# Altium PCB ESP32 with USBC PCB V1I1.PcbDoc (part 2 of 2)
Units mil, origin at the board's own origin, x right, y up, seen from the top; angles counter-clockwise.
Board outline 2700 x 1000 mil, 4 copper layers (L1, L2, L3, L4), stack 61.583 mil thick; 64 components, 73 nets, 299 pads, 161 vias.
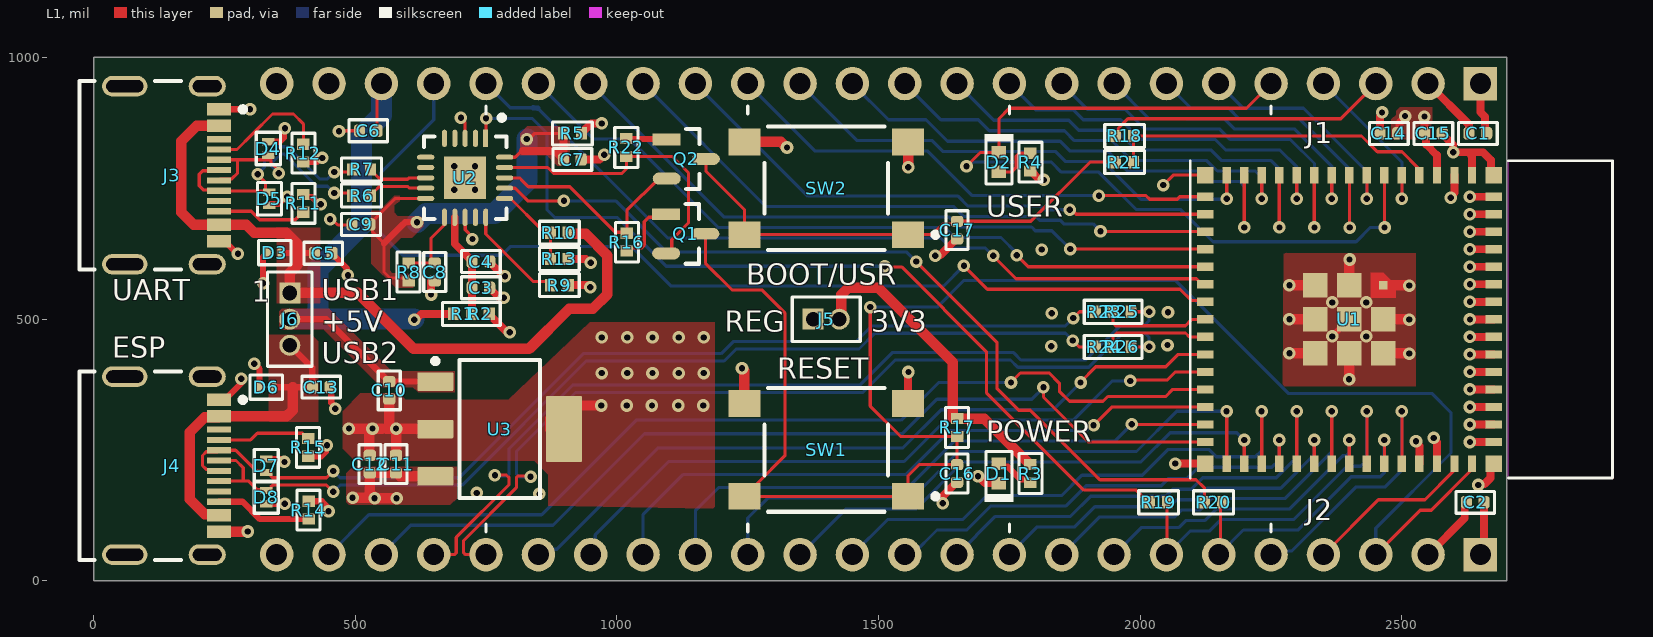
[diagram p0: L1 view]

## Part data (continued)
U2: "IC USB SERIAL FULL UART 20QFN", Case/Package=HVQCCN, LCSC Part Number=C132159, Manufacturer=FTDI, Max Operating Temperature=85°C, Max Supply Current=8.4mA, Max Supply Voltage=5.5V, Min Operating Temperature=-40°C, Min Supply Voltage=2.97V, Nominal Supply Voltage=5V, Package Shape=Square, Package Style="CHIP CARRIER, HEAT SINK/SLUG, VERY THIN PROFILEMeter", Power Supplies=3.3/5V, Supplier Part Number=768-1128-1-ND, Temperature Grade=INDUSTRIAL, Category="Interface ICs", ComponentLink1Description=https://datasheet.ciiva.com:443/pdfs/VipMasterIC/IC/FTDI/FTDIS00099/FTDIS00099-1.pdf?src-supplier=IHS+Markit, ComponentLink1URL=https://datasheet.ciiva.com:443/pdfs/VipMasterIC/IC/FTDI/FTDIS00099/FTDIS00099-1.pdf?src-supplier=IHS+Markit, ComponentLink2Description=https://datasheet.ciiva.com/1787/ds-ft231x-1787312.pdf?src-supplier=Digikey, ComponentLink2URL=https://datasheet.ciiva.com/1787/ds-ft231x-1787312.pdf?src-supplier=Digikey, ComponentLink3Description=https://datasheet.ciiva.com/30475/0900766b811020d3-30475405.pdf?src-supplier=Rs, ComponentLink3URL=https://datasheet.ciiva.com/30475/0900766b811020d3-30475405.pdf?src-supplier=Rs, ComponentLink4Description=https://datasheet.ciiva.com/4787/ds-ft231x-13571-4787570.pdf?src-supplier=Mouser, ComponentLink4URL=https://datasheet.ciiva.com/4787/ds-ft231x-13571-4787570.pdf?src-supplier=Mouser, ComponentLink5Description=https://datasheet.ciiva.com/1787/ft-x-series-1787313.pdf?src-supplier=Digikey, ComponentLink5URL=https://datasheet.ciiva.com/1787/ft-x-series-1787313.pdf?src-supplier=Digikey, ComponentLink6Description=https://datasheet.ciiva.com/1787/ft-x-series-1787314.pdf?src-supplier=Digikey, ComponentLink6URL=https://datasheet.ciiva.com/1787/ft-x-series-1787314.pdf?src-supplier=Digikey, Height - Seated (Max)=0.8mm, JESD-30 Code=S-XQCC-N20, Length=4mm, Manufacturer Part Number=FT231XQ-R, Pins=20, Pricing="1=2.34, 25=2.27, 100=2.2, 250=2, 500=1.82002, 1000=1.7625 (USD)", Qualification Status="Not Qualified", Reach SVHC Compliant=Yes, RoHS=Yes, RoHS Compliant=Yes, Stock=35802, Supplier=Digikey, Surface Mount=Yes, Technology=CMOS, Terminal Form="No Lead", Terminal Pitch=0.5mm, Terminal Position=QUAD, Width=4mm
U3: "IC REG LIN 3.3V 1.5A SOT-223-4", Case/Package=SOP, Dropout Voltage1-Max=550mV, Dropout Voltage1-Nom=340mV, Input Voltage Absolute-Max=20V, LCSC Part Number=C181262, Manufacturer="Texas Instruments", Min Input Voltage=3.8V, Operating Temperature, TJ-Max=125°C, Operating Temperature, TJ-Min=-40°C, Output Current1-Max=1.5A, Output Voltage1-Max=3.4V, Output Voltage1-Min=3.2V, Output Voltage1-Nom=3.3V, Package Body Material=Plastic, Package Shape=Rectangular, Peak Reflow Temperature (Cel)=260°C, Supplier Part Number=296-24897-1-ND, Voltage Tolerance-Max=3%, Adjustability=FIXED, Category="Voltage Regulators - Linear", Channels=1, ComponentLink1Description=https://www.ti.com:443/lit/ds/symlink/tl1963a.pdf?src-supplier=IHS+Markit, ComponentLink1URL=https://www.ti.com:443/lit/ds/symlink/tl1963a.pdf?src-supplier=IHS+Markit, ComponentLink2Description=https://datasheet.ciiva.com/2046/-2046068.pdf?src-supplier=Digikey, ComponentLink2URL=https://datasheet.ciiva.com/2046/-2046068.pdf?src-supplier=Digikey, Height - Seated (Max)=1.8mm, JESD-30 Code=R-PDSO-G4, JESD-609 Code=e3, Length=6.5mm, Manufacturer Part Number=TL1963A-33DCYR, Max Supply Voltage=20V, Moisture Sensitivity Level=2, Number of Outputs=1, Packaging="Tape and Reel", Pins=4, Pricing="1=2.77, 10=2.069, 25=1.8936, 100=1.7, 250=1.60772, 500=1.55212, 1000=1.50634 (USD)", Qualification Status="Not Qualified", Reach SVHC Compliant=Yes, Regulator Type="FIXED POSITIVE SINGLE OUTPUT LDO REGULATOR", RoHS=Yes, RoHS Compliant=Yes, Stock=2845, Supplier=Digikey, Surface Mount=Yes, Technology=BIPOLAR, Terminal Finish=Tin, Terminal Form="Gull Wing", Terminal Pitch=2.3mm, Terminal Position=DUAL, Width=3.5mm

## Via types
v1: diameter 24, hole 12, L1 to L4, tented both sides, 161 vias

## Nets (pads, with @x,y where several pads share a name; then routed paths per layer and width w, separated by ;. In a path a pad name is that pad's centre, name@x,y a point inside that pad or via, vN(x,y) a via of type N, cw(c..) or ccw(c..) an arc to the next point about the centre after c; other vN are vias at no path point)
+3V3: C1.2 C2.2 C14.2 C15.2 J1.2 J2.1 J5.2 R2.1 R3.2 R4.2 R5.1 R17.2 U1.3 | length 4635.6
  L1 w15: R2.1 756,508.82 789.82,475 v1(795,475) ; R5.1 932.01,856.18 935.14,859.31 936.32,859.31 951.01,874 v1(971,874) ; R4.2 1791.18,782.99 1808.17,766 v1(1815.78,766) ; C14.2@2491.93,856.18 2495.06,859.31 2495.06,874.62 2506,885.56 v1(2506,888) ; v1(2543,887) 2543.07,886.93 C15.2 2546.2,851.87 2546.2,833.98 2566.73,813.44 U1.3 ; J1.2 2628.07,871.93 C1.2 ; J2.1 2656.93,56.93 C2.2
  L1 w20: J5.2 1428.83,503.83 1428.83,546.83 1442,560 1499.33,560 1642,417.33 R17.2@1642,311.61 ; R17.2 1702.01,310 1788.19,223.82 1788.19,222.64 1788.82,222.01 R3.2
  L2 w15: v1(2506,888) 2542,888 v1(2543,887)
  L2 w20: 2496,804 2553,747 2553,367 2593,327 2593,174 2650,117 J2.1
  L2 w40: v1(795,475) 840,520 840,608 782,666 782,856.6 786,860.6 786,861.4 810.6,886 959,886 v1(971,874) 1092,874 1222,744 1424,744 ; J5.2 1425,743 1424,744 ; J1.2 2545.41,945.41 2545.41,889.41 v1(2543,887) 2543,851 2496,804 1853.78,804 v1(1815.78,766) 1793.78,744 1424,744
+3V3_FTDI: C7.2 C9.2 R5.2 R8.1 U2.10 U2.20 | length 924.7
  L1 w6: R8.1@595,572.99 589.37,578.62 566.38,578.62 555,590 555,644.79 533.17,666.62 533.17,687.08 533,687.25 576.38,730.63 U2.10 ; U2.20 805.63,809.37 817.26,821 820,821 ; v1(828,844) 831.79,844 842.79,855 R5.2 R5.2 ; C7.2 C7.2@898.03,805.04
  L1 w12: 555,644.79 591,680.79 595.21,685 v1(618,685)
  L1 w15: 820,821 882.07,821 893.76,809.31 894.94,809.31 C7.2@898.03,806.22 ; C7.2 C7.2@898.07,806.18 ; C7.2@898.03,805.04 C7.2@898.03,806.22 ; R5.2 C7.2@898.03,806.22 ; C7.2@898.03,806.22 C7.2@898.07,806.18
  L4 w40: v1(618,685) 635,702 766,702 828,764 v1(828,844)
+3V3_REG: C11.2 C12.2 J5.1 U3.3 | length 1229.7
  L1 w20: v1(495,159) 495.5,158.5 536.5,158.5 v1(537,158) ; v1@495.5,159 v1@496,158.5 ; 564.19,206.07 C12.2 528,168.08 537,159.08 v1(537,158) ; C11.2@577.37,206.07 578,205.44 C11.2@579,205.44 ; C11.2 578.37,206.07 C11.2@579,205.44 ; v1(579,158) v1(537,158) ; U3.3 585.8,199.45 579.81,205.44 C11.2@579,205.44
  L2 w40: v1(579,158) 607,158 668,219 ; 1335,459 1335,460 J5.1
  L2 w60: 668,219 732,283 1225,283 1335,393 1335,459
+5V: C6.2 C10.2 J1.22 J6.2 R1.1 U3.1 | length 1234.1
  L1 w6: C6.2 541.93,941.93 J1.22
  L1 w12: J6.2 444.75,500 563.82,380.93 C10.2 565.19,380.74 652.81,380.74 U3.1
  L1 w15: v1(613,499) 615.44,499 626.44,510 R1.1
  L4 w40: J6.2 425,500 ; J1.22 550,889 512,851 512,679.6 428.57,596.18 428.57,500 v1@612,500
+5V_VBUS1: C5.2 D3.2 J3.A4B9 J3.B4A9 J6.1 R10.2 | length 1492.4
  L1 w12: D3.2 359.3,626.5 390.4,626.5 421.5,626.5 C5.2
  L1 w20: J3.A4B9 197.49,869.49 168,840 168,704 191.49,680.51 J3.B4A9 291.59,680.51 307.11,665 368,665 390.4,642.6 390.4,626.5 390.4,604.4 375,589 J6.1 505,550 612,443 832,443 909,520 954,520 982,548 982,621.26 940.07,663.19 907.64,663.19 907.01,663.82 R10.2
+5V_VBUS2: C13.2 D6.2 J4.A4B9 J4.B4A9 J6.3 | length 627.6
  L1 w12: D6.2 380.43,370 C13.2 418.07,406.93 J6.3
  L1 w20: J4.B4A9 238.03,127.32 212.45,127.32 184,155.77 184,284.23 212.45,312.68 238.03,312.68 J4.A4B9 368.72,314.49 380.43,326.2 380.43,370
+VCC_FTDI: C3.1 C4.2 R1.2 R2.2 U2.12 | length 198.2
  L1 w6: 690.23,667 690.32,667.09 ; C4.2 C4.2@723.07,611.18
  L1 w15: 690.23,667 690.23,644.03 C4.2@723.07,611.18 ; 690.32,667.09 U2.12 ; R2.2@723.07,510 C3.1 C4.2
BTN_GPIO0: C17.2 Q2.3 R21.1 SW2.1 SW2.2 | length 941.9
  L1 w6: Q2.3 1170,783 1243.5,709.5 SW2.2 SW2.1 1602.49,661.42 1623.19,682.12 1645.19,682.12 C17.2 1790.93,686.93 1904,800 R21.1
CHIP_PU: C16.2 J2.3 Q1.3 R17.1 SW1.1 SW1.2 U1.45 | length 3349.6
  L1 w6: Q1.3 1169,607 1220,556 1277,556 1321,512 1321,238.91 1269.02,186.93 1269.02,182.01 1248.43,161.42 SW1.2 SW1.1 1556.5,201.14 1577.28,221.93 C16.2 R17.1 1541.78,275.98 1484,333.76 v1(1484,523) ; J2.3 2534.85,134.85 2555.86,134.85 2630.79,209.77 2630.79,221.14 U1.45
  L4 w6: v1(1484,523) 1612.28,523 1663.28,574 2067,574 2282.8,358.2 2556.8,358.2 2593.63,321.37 2593.63,244.27 2450,100.64 J2.3
CON1_USB_N: D4.2 J3.A7 J3.B7 R6.1 | length 416.8
  L1 w6.03: J3.A7 242.73,768.05 264.34,768.05 275,778.71 275,804.47 ; J3.B7 239.9,804.47 275,804.47 ; v1(354,779) 354,783.86 343.76,794.1 343.76,794.26 339,799.03 339,804.41 338.94,804.47 275,804.47 ; v1(460,741) 489.99,741 R6.1
  L4 w6.03: v1(354,779) 353,779 341.01,790.99 341.01,798.56 357.95,815.5 364.5,815.5 426.01,753.99 447.01,753.99 v1(460,741)
CON1_USB_P: D5.2 J3.A6 J3.B6 R7.1 | length 490.4
  L1 w6.03: J3.A6 238.69,783.69 208.69,783.69 202,777 202,755 210.37,746.63 238.69,746.63 240.52,744.8 D5.2@336,744.8 ; v1(314,777) 314,775.89 328.32,761.56 328.32,748.67 331.72,745.28 D5.2@337.61,745.28 ; v1(460,781) 489.99,781 R7.1
  L4 w6.03: v1(314,777) 314,778 326.99,790.99 326.99,804.37 352.14,829.53 370.31,829.53 431.83,768.01 447.01,768.01 v1(460,781)
CON2_USB_N: D7.2 J4.A7 J4.B7 R23.1 | length 1930.5
  L1 w6.03: J4.A7 236.95,213.05 215.34,213.05 208.19,220.2 208.19,239.48 215.34,246.64 236.95,246.64 J4.B7 271.53,249.53 309.97,211.08 326.13,211.08 D7.2 334.92,207.2 338.8,203.33 338.8,200.55 342.33,197.01 399.56,197.01 399.61,196.97 445.01,196.97 v1(457.9,209.9) ; v1(1872,502) 1884,514 R23.1
  L4 w6.03: v1@457.95,209.9 470.89,196.97 698.44,196.97 935.52,434.05 1199.05,434.05 1222.03,457.03 1456.81,457.03 1486.78,487 1856.61,487 1871.61,502 v1(1872,502)
CON2_USB_P: D8.2 J4.A6 J4.B6 R24.1 | length 1906.4
  L1 w6.03: J4.B6 286,190.47 ; J4.A6 272.16,229.84 286,216 286,190.47 ; v1(458,170) 445.01,182.94 393.8,182.94 393.75,182.99 342.33,182.99 338.8,179.45 338.8,176.67 334.92,172.8 D8.2 328.47,174.32 312.68,174.32 296.53,190.47 286,190.47 ; v1(1871,459) 1883,447 R24.1
  L4 w6.03: v1(458,170) 470.89,182.94 704.25,182.94 941.33,420.01 1204.86,420.01 1221.97,437.12 ; 1221.98,437.14 1227.84,443 1462.62,443 1492.59,472.97 1857.03,472.97 v1(1871,459)
CON_ESP_USB_N: J2.21 R25.1 | length 1724.4
  L1 w6.03: J2.21 689.45,50 692.99,53.53 692.99,82.99 793.99,183.99 793.99,196.97 788.95,202 v1(767,202) ; R25.1 v1(2017,514)
  L4 w6.03: v1(767,202) 768.5,200.5 790.45,200.5 793.99,204.03 793.99,252.83 915.14,373.99 1463.99,373.99 1526.05,436.05 1757.96,436.05 1771.97,422.03 1895.96,422.03 1961.45,487.51 2007.51,487.51 2016.65,496.65 2016.65,513.65 v1(2017,514)
CON_ESP_USB_P: J2.20 R26.1 | length 1701.7
  L1 w6.03: J2.20 710.55,50 707.01,53.53 707.01,77.17 808.01,178.17 808.01,196.97 811.55,200.5 833.5,200.5 v1(835,199) ; R26.1 v1(2017,447)
  L4 w6.03: v1(835,199) 813.05,199 808.01,204.03 808.01,247.01 920.95,359.95 1469.8,359.95 1531.86,422.01 1752.14,422.01 1766.16,408 1901.77,408 1967.26,473.49 2008.51,473.49 2017,465 v1(2017,447)
CON_GPIO0: J1.3 R18.1 | length 544.1
  L1 w6: R18.1 1958.62,855.63 1958.62,865.27 1976.35,883 2383,883 J1.3
DTR_FTDI: Q2.2 R16.1 U2.18 | length 422.7
  L1 w6: U2.18 813.91,770 819.37,764.54 830.91,753 910,753 997,666 1017.01,666 R16.1 1019,707.9 1079.7,768.6 Q2.2
ESP_USB_N: R23.2 R25.2 U1.23 | length 204.3
  L1 w6.03: R23.2 1948.01,492.59 1953.09,487.51 2086.51,487.51 2098.61,499.61 U1.23
ESP_USB_P: R24.2 R26.2 U1.24 | length 201.2
  L1 w6.03: R24.2 1947.99,466.46 1955.02,473.48 2086.52,473.48 2093.86,466.14 U1.24
FTDI_RESET: C8.2 R8.2 U2.11 | length 148.3
  L1 w6: R8.2@595,607.01 595.04,606.97 644.96,606.97 645,606.93 645,655 670.63,680.63 U2.11
FTDI_USB_N: R6.2 U2.9 | length 114.5
  L1 w6.03: R6.2 529.01,737.18 536.62,744.8 537.8,744.8 546.15,753.14 600.86,753.14 603.68,750.32 U2.9
FTDI_USB_P: R7.2 U2.8 | length 115.2
  L1 w6.03: R7.2 529.01,784.82 536.62,777.2 537.8,777.2 547.84,767.17 591,767.17 600.17,767.17 603,770 U2.8
GND: C1.1 C2.1 C3.2 C4.1 C5.1 C6.1 C7.1 C8.1 C9.1 C10.1 C11.1 C12.1 C13.1 C14.1 C15.1 C16.1 C17.1 D1.1 D3.1 D4.1 D5.1 D6.1 D7.1 D8.1 J1.1 J1.23 J2.2 J2.24 J3.A1B12 J3.B1A12 J3.S1 J3.S2 J3.S3 J3.S4 J4.A1B12 J4.B1A12 J4.S1 J4.S2 J4.S3 J4.S4 R9.2 R11.1 R12.1 R13.1 R14.1 R15.1 SW1.3 SW1.4 SW2.3 SW2.4 U1.1 U1.2 U1.42 U1.43 U1.46 U1.47 U1.48 U1.49 U1.50 U1.51 U1.52 U1.53 U1.54 U1.55 U1.56 U1.57 U1.58 U1.59 U1.60 U1.61 U1.62 U1.63 U1.64 U1.65 U1.66 U1.67 U1.68 U1.69 U1.70 U1.71 U1.72 U1.73 U2.3 U2.13 U2.21 U3.2 U3.4 | length 3975.1
  L1 w6: v1(452,691) 455.79,691 466.79,680 C9.1@497.06,680 ; v1(469,859) 470,860 C6.1 ; v1(702,885) 710,877 U2.3 ; U2.13 710.23,694.36 710.23,670.56 724,656.79 v1(724,653) ; C3.2@756.93,559.16 C3.2 ; C4.1@756.93,608.82 C4.1 ; v1(2043.9,756.21) 2044.12,756.21 2063.1,775.2 U1.63
  L1 w12: J4.A1B12 250.67,345.98 282,377.32 v1(282,386) ; J3.B1A12 250.67,649.02 274.68,625 v1(275.84,625) v1@277,625 ; J3.A1B12 v1(298.98,900.98) ; v1(307,415) 317.2,404.8 D6.1 ; v1@325,568 v1(324.5,568.5) 324,569 324,618.87 333.2,628.08 D3.1@333.2,633 ; D8.1 365.8,147.2 v1@366,147 ; D7.1 359.2,232.8 v1(364.75,227.25) v1@365,227 ; D4.1 355.8,838.8 363.41,846.41 363.41,862.7 v1(365.7,865) ; D5.1@336,719.2 336.89,720.09 352.85,720.09 366.75,734 v1(370,734) ; R11.1 405.63,733.58 416.81,733.58 431.11,719.28 v1(434.36,719.28) ; R12.1 425.95,800.2 433.75,808 v1(437,808) ; R15.1 435.17,237.99 443.7,246.53 443.7,256.7 v1(446,259) ; R14.1 436.43,152 446.7,141.72 446.7,135.3 v1(449,133) ; C13.1@452.01,368.82 454.06,366.77 454.06,340.19 462,332.25 v1(462,329) ; C5.1 455.86,624.82 483.7,596.97 483.7,586.3 v1(486,584) ; v1(2367,467) 2367,467.2 U1.61
  L1 w15: v1(645,547) C8.1@645,573.07 ; C3.2@756.93,559.16 756.93,558.82 773.03,542.72 782.28,542.72 v1(784,541) ; C4.1@756.93,608.82 783.75,582 v1(786,582) ; R9.2 942.56,565 946.56,561 v1(949,561) ; R13.1 940.56,615 947.56,608 v1(950,608) ; C7.1 967,805 v1(976,814) ; SW1.3 1556.5,398.5 v1(1557,399) ; v1(1608,621) 1609.72,622.72 1618.47,622.72 1645.69,649.94 1646.87,649.94 C17.1 ; v1@1623,148 1623,162.25 1648.82,188.07 C16.1 ; v1(1690,200) 1690.28,200 1703.29,187 1729.3,187 D1.1 ; v1@2067.02,224.02 U1.64 ; C14.1 2458.07,888.64 2462,892.56 v1(2462,895) ; v1(2526.8,266.76) 2526.8,264.33 2533.27,257.86 U1.42 ; J2.2 2619.94,119.94 2619.94,146.87 C2.1 ; v1(2561,273) 2561,270.56 2566.73,264.83 U1.43 ; C15.1 2576.93,853.82 2598,832.75 v1(2598,819) 2626.5,819 ; v1(2593,732) 2593,734.44 2600.2,741.63 U1.2 ; v1@2630,265.35 U1.46 ; v1@2630,298.82 U1.47 ; v1@2630,332.28 U1.48 ; v1@2630,365.75 U1.49 ; v1@2630,399.21 U1.50 ; v1@2630,432.68 U1.51 ; v1@2630,466.14 U1.52 ; v1@2630,499.61 U1.53 ; v1@2630,533.07 U1.54 ; v1@2630,566.54 U1.55 ; v1@2630,600 U1.56 ; v1@2630,633.46 U1.57 ; v1@2630,666.93 U1.58 ; v1@2630,700.39 U1.59 ; v1@2630,733.86 U1.60 ; U1.1 2633.66,811.84 2626.5,819 ; v1(2645.96,183.16) 2647.69,184.88 2657.88,184.88 2669.35,196.35 2669.35,218.37 U1.65 ; J1.1 2650,895.5 2658.8,886.7 2658.8,858.13 C1.1 ; U1.62 2670.24,779.95 2670.24,803.76 2655,819 2626.5,819
  L1 w20: J4.B1A12 v1@294.98,94.02 ; v1(488,291) v1(533,291) ; C12.1@527,240.56 527,283.92 533,289.92 v1(533,291) ; 550.5,291 v1(533,291) ; 559.83,291 v1(578,291) 578.77,290.23 619.85,290.23 620.58,289.5 U3.2@626.47,289.5 ; 565,291 C10.1 ; C11.1@578,240.56 v1@578,289.92 ; U3.4@873.03,290 873.03,309.55 898.48,335 v1(970,335) ; v1(1239,406) 1243.5,401.5 SW1.4 ; SW2.4 1313.33,838.58 1323.92,828 v1(1325,828) ; v1@1555,789 v1(1556.5,790.5) SW2.3 ; v1(2285,565) 2285.43,564.57 U1.71 ; v1@2285.43,434.65 U1.73 ; v1@2285.43,499.61 U1.72 ; v1@2399.41,385.63 U1.70 ; U1.69 v1@2399.41,613.58 ; U1.68 v1@2513.39,434.65 ; U1.67 v1@2513.39,499.61 ; U1.66 v1@2513.39,564.57
  other v1: 294.73,94.27 365.55,147.45 1622.72,148 852,166 732,168 2066.92,224.11 2629.9,265.26 2629.9,298.72 2629.9,332.18 1019,335 1067,335 1117,335 1165,335 2629.9,365.65 2398.98,385.2 971,397 1020,397 1068,397 1118,397 1166,397 2629.9,399.11 2629.9,432.58 2513.82,434.21 2285,435.08 1830,448.47 2052,450.47 971,465 1020,465 1068,465 1118,465 1166,465 2629.9,466.04 2432,467 2513.82,499.17 2285,500.04 2629.9,499.51 1831,511 2053,513 2367,532 2432,532 2629.9,532.97 2513.82,564.13 2629.9,566.44 2629.9,599.9 2399.84,614.02 1812,633 2629.9,633.37 2629.9,666.83 2629.9,700.3 2629.9,733.76 689,747 729,747 689,792 729,792
GPIO0: R18.2 R21.2 U1.4 | length 633.9
  L1 w6: R21.2 R18.2 2422.72,850 2453,819.72 2500.11,819.72 2530.39,789.44 2530.39,778.07 U1.4
GPIO1: J1.4 U1.5 | length 327.4
  L1 w6: U1.5 2499.9,775.1 2499.9,730.1 v1(2500,730)
  L4 w6: J1.4 2500,800 v1(2500,730)
GPIO2: D2.1 J1.5 U1.6 | length 1661
  L1 w6: v1(1668,792) 1694.7,818.7 D2.1 1730,883 1750,903 2203,903 J1.5 ; v1@2466.49,675.44 U1.6@2466.49,775.05
  L4 w6: v1(1668,792) 1671.79,792 1679.79,800 1830.29,800 1849.29,781 1921.01,781 1992.8,709.21 2049.36,709.21 2077.65,709.21 2138.86,648 2412.33,648 2439.48,675.15 v1(2466.78,675.15)
GPIO3: J1.6 U1.7 | length 449.3
  L1 w6: v1@2432.87,730.2 U1.7
  L4 w6: J1.6 2197,903 2312,903 2432.33,782.67 v1@2432.33,730
  other v1: 2432.97,730.1
GPIO4: J1.7 U1.8 | length 629.8
  L1 w6: U1.8 2399.7,774.9 2399.7,675.3 v1(2400,675)
  L4 w6: J1.7 2097,903 2168.72,903 2188.72,883 2303.72,883 2400,786.72 v1(2400,675)
GPIO5: J1.8 U1.9 | length 588.6
  L1 w6: v1@2365.94,730.2 U1.9
  L4 w6: J1.8 2016.79,883.21 2088.72,883.21 2088.93,883 2160.43,883 2180.43,863 2295.43,863 2366.04,792.39 v1(2366.04,730.1)
GPIO6: J1.9 U1.10 | length 767.7
  L1 w6: v1@2332.48,675.59 U1.10
  L4 w6: J1.9 1899,901 1970.72,901 2008.5,863.21 2080.43,863.21 2080.65,863 2152.15,863 2172.15,843 2287.15,843 2332.78,797.37 v1(2332.78,675.3)
GPIO7: J1.10 U1.11 | length 720.8
  L1 w6: v1@2299.02,730.2 U1.11
  L4 w6: J1.10 1800,900 1871.72,900 1890.72,881 1962.43,881 2000.22,843.21 2072.15,843.21 2072.36,843 2143.86,843 2163.86,823 2267,823 2299.11,790.89 v1(2299.11,730.1)
GPIO8: J1.11 U1.12 | length 894.8
  L1 w6: v1@2265.55,675.59 U1.12
  L4 w6: J1.11 1720,880 1863.43,880 1882.43,861 1954.15,861 1991.93,823.21 2063.86,823.21 2064.08,823 2135.58,823 2155.58,803 2250,803 2265.85,787.15 v1(2265.85,675.3)
GPIO9: J1.12 U1.13 | length 842.1
  L1 w6: v1@2232.09,730.2 U1.13
  L4 w6: J1.12 1619,881 1690.72,881 1711.72,860 1855.15,860 1874.15,841 1945.86,841 1983.65,803.21 2055.58,803.21 2055.79,803 2127.29,803 2147.29,783 2220,783 2232.18,770.82 v1(2232.18,730.1)
GPIO10: J1.13 U1.14 | length 1008.5
  L1 w6: v1@2198.62,675.59 U1.14
  L4 w6: J1.13 1519,881 1590.72,881 1631.72,840 1846.86,840 1865.86,821 1937.58,821 1975.36,783.21 2047.29,783.21 2047.51,783 2119.01,783 2139.01,763 2190,763 2198.92,754.08 v1(2198.92,675.3)
GPIO11: J1.14 U1.15 | length 952.1
  L1 w6: v1@2165.16,730.2 U1.15
  L4 w6: J1.14 1459,841 1602.43,841 1623.43,820 1838.58,820 1857.58,801 1929.29,801 2001.08,729.21 2057.65,729.21 2164.37,729.21 v1(2165.26,730.1)
GPIO12: J1.15 U1.16 | length 967.2
  L1 w6: v1(1921,736) 2011,736 2017.79,729.21 2070.57,729.21 2075.22,733.86 U1.16
  L4 w6: J1.15 1379,821 1594.15,821 1679.15,736 v1(1921,736)
GPIO13: J1.16 U1.17 | length 1077.2
  L1 w6: v1(1865,709) 1868.79,709 1877.39,700.39 U1.17
  L4 w6: J1.16 1365,735 1651.86,735 1670.86,716 1808.95,716 1815.95,709 v1(1865,709)
GPIO14: J1.17 U1.18 | length 1191.1
  L1 w6: v1(1924,668) 1924.54,667.46 2123.28,667.46 U1.18
  L4 w6: J1.17 1285,715 1643.58,715 1662.58,696 1800.66,696 1807.66,689 1846.82,689 1853.82,682 1910,682 v1(1924,668)
GPIO15: J1.18 U1.19 | length 1304.9
  L1 w6: v1(1866,634) 1866.27,633.73 2123.55,633.73 U1.19
  L4 w6: J1.18 1205,695 1635.29,695 1654.29,676 1792.38,676 1799.38,669 1831,669 v1(1866,634)
GPIO16: J1.19 U1.20 | length 1421
  L1 w6: v1(1764,622) 1786,600 U1.20
  L4 w6: J1.19 956,844 1024.5,844 1193.5,675 1627.01,675 1646.01,656 1733.79,656 1764,625.79 v1(1764,622)
GPIO17: J1.20 U1.21 | length 1533.6
  L1 w6: v1(1719,621) 1719,620.72 1762.59,577.13 2107.21,577.13 2113.07,571.27 2113.07,569.41 2115.94,566.54 U1.21
  L4 w6: J1.20 793.07,906.93 796,904 840.36,904 ; 848.8,903.02 1096.82,655 1618.73,655 1637.73,636 1704,636 v1(1719,621)
  L4 w10: 840.36,904 ccw(c850,950) 848.8,903.02
GPIO18: J1.21 U1.22 | length 2004.1
  L1 w6: v1(1663,602) 1707.87,557.13 2076,557.13 2097.18,535.94 2120.94,535.94 U1.22
  L4 w6: J1.21 650,881 591,822 548,779 548,665 591,622 779.83,622 796.83,639 1027.72,639 1103.72,563 1624,563 v1(1663,602)
GPIO21: J2.19 U1.25 | length 1432.9
  L1 w6: v1(1886,379) 1886,380 1915,409 2048.72,409 2072.39,432.68 U1.25
  L4 w6: J2.19 860.33,60.33 885.33,60.33 1079,254 1546.58,254 1619.58,327 1834,327 v1(1886,379)
GPIO26: J2.18 U1.26 | length 1335.5
  L1 w6: v1(1981,382) 1983,384 2052,384 2067.21,399.21 U1.26
  L4 w6: J2.18 958.73,58.73 958.73,87.73 1099,228 1548.86,228 1627.86,307 1872,307 1947,382 v1(1981,382)
GPIO33: J2.17 U1.28 | length 1235.7
  L1 w6: v1@1911,297 1946.28,332.28 U1.28
  L4 w6: J2.17 1050,127 1126,203 1552.15,203 1636.15,287 1896.62,287 1906.92,297.3 v1(1910.7,297.3)
GPIO34: J2.16 U1.29 | length 1125.9
  L1 w6: v1@1983.82,298.82 U1.29
  L4 w6: J2.16 1150,134 1194,178 1555.43,178 1644.43,267 1951.41,267 v1(1983.52,299.11)
GPIO35: J2.15 U1.31 | length 1168.9
  L1 w6: U1.31 v1@2165.16,323.62
  L4 w6: J2.15 1250,120 1288,158 1563.72,158 1652.72,247 1992.79,247 2069.71,323.92 v1(2164.86,323.92)
GPIO36: J2.14 U1.32 | length 995.8
  L1 w6: U1.32 v1@2198.62,269.02
  L4 w6: J2.14 1437,137 1571,137 1661,227 2001.07,227 2057.07,283 2184.64,283 v1(2198.52,269.11)
GPIO37: J2.13 U1.33 | length 1050.6
  L1 w6: U1.33 v1@2232.09,323.62
  L4 w6: J2.13 1517,117 1660.43,117 1706.57,163.14 1850.01,163.14 1888.51,201.64 2004,201.64 2053.47,251.11 2130.81,251.11 2144.92,237 2220,237 2231.79,248.79 v1(2231.79,323.92)
GPIO38: J2.12 U1.34 | length 873.6
  L1 w6: U1.34 v1@2265.55,269.02
  L4 w6: J2.12 1564.61,50 1611.61,97 1668.72,97 1714.86,143.14 1858.29,143.14 1896.79,181.64 2040.22,181.64 2053.58,195 2089.15,195 2111.15,217 2251.5,217 2265.45,230.95 v1(2265.45,269.11)
GPIO39: J2.11 U1.35 | length 913.3
  L1 w6: U1.35 v1@2299.02,323.62
  L4 w6: J2.11 1723.14,123.14 1866.57,123.14 1905.07,161.64 2048.51,161.64 2061.86,175 2097.43,175 2119.43,197 2259.79,197 2298.72,235.93 v1(2298.72,323.92)
GPIO40: J2.10 U1.36 | length 734.4
  L1 w6: U1.36 v1@2332.48,269.02
  L4 w6: J2.10 1803.14,103.14 1874.86,103.14 1913.36,141.64 2056.79,141.64 2070.15,155 2105.72,155 2127.72,177 2268.07,177 2332.38,241.31 v1(2332.38,269.11)
GPIO41: J2.9 U1.37 | length 774.2
  L1 w6: U1.37 v1@2365.94,323.62
  L4 w6: J2.9 1921.64,121.64 2065.07,121.64 2078.43,135 2114,135 2136,157 2276.36,157 2365.65,246.29 v1(2365.65,323.92)
GPIO42: J2.8 U1.38 | length 599.3
  L1 w6: U1.38 v1@2399.41,269.02
  L4 w6: J2.8 2001.64,101.64 2073.36,101.64 2086.72,115 2123,115 2145,137 2284.64,137 2386.64,239 2393.45,239 2399.31,244.86 v1(2399.31,269.11)
GPIO45: J2.5 U1.41 | length 528.4
  L1 w6: U1.41 v1@2499.8,323.62
  L4 w6: J2.5 2256.99,56.99 2289.48,56.99 2411.49,179 2467,179 2499.51,211.51 v1(2499.51,323.92)
GPIO46: J2.4 U1.44 | length 329.8
  L1 w6: J2.4 2454.85,154.85 2543.94,154.85 2597.32,208.23 2597.32,221.14 U1.44
GPIO47: J2.23 U1.27 | length 1858.3
  L1 w6: v1(1753,379) 1771,397 1826.18,397 1845.5,377.68 1845.5,362.32 1864.82,343 1928.72,343 1938,352.28 2048.57,352.28 2062.03,365.75 U1.27
  L4 w6: J2.23 526.14,126.14 856.14,126.14 1037,307 1543.01,307 1615.01,379 v1(1753,379)
GPIO48: J2.22 U1.30 | length 1761.3
  L1 w6: v1(1815,370) 1815,351 1900.65,265.35 U1.30
  L4 w6: J2.22 606.14,106.14 877.86,106.14 1052.72,281 1545.29,281 1611.29,347 1792.75,347 1815,369.25 v1(1815,370)
NetD1_2: D1.2 R3.1 | length 74.8
  L1 w12: D1.2 1735.81,217.89 1746.93,217.89 1770.94,193.88 1782.93,193.88 1788.82,187.99 R3.1
NetD2_2: D2.2 R4.1 | length 87.1
  L1 w6: D2.2 1754.29,781.3 1763.13,790.14 1763.13,811.13 1769.05,817.05 R4.1 R4.1
NetJ3_A5: J3.A5 R12.2 | length 235.9
  L1 w6: J3.A5 274.21,824.21 303,853 342,892 382,892 401,873 R12.2
NetJ3_B5: J3.B5 R11.2 | length 173.7
  L1 w6: J3.B5 301.36,706.1 303,704.46 317.46,690 385.62,690 399.82,704.2 R11.2
NetJ4_A5: J4.A5 R15.2 | length 179.6
  L1 w6: J4.A5 300.21,269.21 313,282 398.83,282 408.82,272.01 R15.2
NetJ4_B5: J4.B5 R14.2 | length 184.9
  L1 w12: J4.B5 284.77,151.1 317.89,117.98 R14.2
NetQ1_1: Q1.1 R16.2 | length 130.6
  L1 w6: R16.2 1024.63,635.62 1046.43,635.62 1052.29,641.48 1052.29,686.29 1060.68,694.68 1088.43,694.68 Q1.1
NetQ2_1: Q2.1 R22.2 | length 77.8
  L1 w12: R22.2 1018.8,844.2 1094.35,844.2 Q2.1
NetR9_1: R9.1 U2.15 | length 196.7
  L1 w6: U2.15 749.37,667 749.37,662.63 840.19,571.81 867.36,571.81 872.99,566.18 R9.1
RTS_FTDI: Q1.2 R22.1 U2.19 | length 571.3
  L1 w6: U2.19 867.68,789.68 879.18,778.19 1009.19,778.19 1018,787 R22.1 1105.35,810.99 1136.87,779.48 1136.87,683.93 1104.8,651.86 1104.8,631.38 1099.02,625.6 Q1.2
RXD_FTDI: R19.2 U2.1 | length 1744.5
  L1 w6: U2.1 749.69,845.73 749.69,883.69 v1(750,884) ; v1(1512,601) 1513.18,599.82 1544,599.82 1706,437.82 1706,359.53 1892.26,173.27 1992.36,173.27 2008.82,156.81 2012.36,156.81 2017.99,151.18 R19.2@2017.99,148.82 ; R19.2@2023.62,143.19 R19.2@2024.07,143.19
  L4 w6: v1(750,884) 750.68,883.32 819.37,883.32 838.18,883.32 866.55,854.94 866.55,709.08 881.63,694 1001.25,694 1094.25,601 v1(1512,601)
TXD_FTDI: R20.2 U2.17 | length 1653.6
  L1 w6: U2.17 785.64,750.09 805.54,750.09 829.63,726 v1(898.82,726) ; v1(1572,610) 1726,456 1726,367.82 1767.82,326 1790,326 1922.73,193.27 2106.54,193.27 2122.99,176.81 R20.2
  L4 w6: v1(898.82,726) 997.53,726 1095.53,628 1554,628 v1(1572,610)
U0RXD: J2.6 R20.1 U1.40 | length 591.7
  L1 w6: J2.6 2153.5,53.5 2153.5,146.5 R20.1 ; U1.40 v1@2466.34,269.02
  L4 w6: J2.6 2197,97 2269.47,97 2269.57,96.9 2301.1,96.9 2403.21,199 2458.72,199 2466.24,206.52 v1(2466.24,269.11)
U0TXD: J2.7 R19.1 U1.39 | length 751.2
  L1 w6: J2.7 2051,51 2051,149 R19.1 ; U1.39 v1@2432.87,323.62
  L4 w6: J2.7 2095,95 2132,95 2154,117 2277.75,117 2277.86,116.9 2292.82,116.9 2394.92,219 2421,219 2432.58,230.58 v1(2432.58,323.92)
"VBUS SENSE": R10.1 R13.2 U2.16 | length 165.5
  L1 w6: U2.16 796.72,730.63 855.54,671.81 867.36,671.81 872.99,666.18 R10.1 R13.2
pads on no net: J1.24 J3.A8 J3.B8 J4.A8 J4.B8 U2.2 U2.4 U2.5 U2.6 U2.7 U2.14

## Polygon pours and split planes (outlines as drawn)
GND on L1 "GND_L01_P010" (solid, pour order 10): 1187,138 1187,494 947.79,494 792.79,346 754,346 597,346 585,358 510,358 476,324 476,252 499,229 842.08,229 868.55,202.53 868.55,143
GND on L1 "GND_L01_P008" (solid, pour order 8): 2273.97,631.03 2279,626 2526,626 2526,372 2272.01,372
+5V_VBUS2 on L1 "+5V_VBUS2_L01_P007" (solid, pour order 7): 335,470 417,470 429,458 429,304 337,304 335,306
+5V_VBUS1 on L1 "+5V_VBUS1_L01_P006" (solid, pour order 6): 350,675 350,530 433,530 433,675
+5V on L1 "+5V_L01_P005" (solid, pour order 5): 690,400 570,400 450,520 360,520 355,515 355,485 360,480 440,480 550,370 610,370 620,360 690,360
+3V3_REG on L1 "+3V3_REG_L01_P004" (solid, pour order 4): 694,218 694,157 682,145 488,145 483,150 483,206 495,218
+3V3_FTDI on L1 "+3V3_FTDI_L01_P003" (solid, pour order 3): 611,560 577,560 531,606 531,707 546,707 574.12,736 585,736 585,725.12 575,718 575,704 581,697 624,697 630,691 630,676.71 609.29,656 588,656 565.5,633.5 565.5,593 570.5,588 611,588 611,562
+3V3_FTDI on L1 "+3V3_FTDI_L01_P002" (solid, pour order 2): 910,793 910,869 829,869 815,855 815,813 866,813 886,793
+3V3 on L1 "+3V3_L01_P001" (solid, pour order 1): 2480,882 2480,843 2481,844 2556,844 2556,876 2558,878 2558,905 2496,905 2489,898 2489,891
GND on L2 "GND_L02_P014" (solid, pour order 14): 2682.99,18 2682,18.99 2682,982 18,982 18,26
+3V3 on L2 "+3V3_L02_P011" (solid, pour order 11): 2682,982 953,982 905,934 905,852 1072,852 1205,719 1205,628 1346,628 1405,569 1405,479 1441,479 1453,479 1453,605 1515,667 1774,667 1878,771 2499,771 2528,742 2528,194 2392,194 2327,129 2327,18 2682.99,18
+3V3_REG on L2 "+3V3_REG_L02_P012" (solid, pour order 12): 483,137 675,137 675,230 483,230
GND on L3 (split plane): 2699.95,0.05 0.05,0.05 0.05,999.95 2699.95,999.95

## Silkscreen, mask and mechanical layers (free items; w line width, h text height)
Top Overlay:
  lines w6: 750,93 750,108 ; 750,892 750,907 ; 1250,93 1250,108 ; 1250,892 1250,907 ; 1750,93 1750,108 ; 1750,892 1750,907 ; 2250,93 2250,108 ; 2250,892 2250,907
  text "J1" at 2316,836 h40
  text "USER" at 1706,696 h40
  text "BOOT/USR" at 1246.72,566 h40
  text "UART" at 36,536 h40
  text "USB1" at 436,536 h40
  text "+5V" at 436,476 h40
  text "REG" at 1206,476 h40
  text "3V3" at 1486,476 h40
  text "ESP" at 36,426 h40
  text "USB2" at 436,416 h40
  text "RESET" at 1306.7,386 h40
  text "POWER" at 1706,266 h40
  text "J2" at 2316,116 h40
Bottom Overlay:
  text "NC" at 371,882 h40 r90
  text "GND" at 471,882 h40 r90
  text "5V" at 571,882 h40 r90
  text "IO18" at 671,882 h40 r90
  text "IO17" at 771,882 h40 r90
  text "IO16" at 871,882 h40 r90
  text "IO15" at 971,882 h40 r90
  text "IO14" at 1071,882 h40 r90
  text "IO13" at 1171,882 h40 r90
  text "IO12" at 1271,882 h40 r90
  text "IO11" at 1371,882 h40 r90
  text "IO10" at 1471,882 h40 r90
  text "IO9" at 1571,882 h40 r90
  text "IO8" at 1671,882 h40 r90
  text "IO7" at 1771,882 h40 r90
  text "IO6" at 1871,882 h40 r90
  text "IO5" at 1971,882 h40 r90
  text "IO4" at 2071,882 h40 r90
  text "IO3" at 2171,882 h40 r90
  text "IO2" at 2271,882 h40 r90
  text "IO1" at 2371,882 h40 r90
  text "IO0" at 2471,882 h40 r90
  text "3V3" at 2571,882 h40 r90
  text "GND" at 2671,882 h40 r90
  text "<---PIN1--->" at 2670,743 h40 r90
  text "ALAN PRACTICE" at 2079,632 h80
  text "(C)2025 ALAN" at 1819,404 h40
  text "HAVE FUN V1I1" at 1825,334 h40
  text "GND" at 367,260 h40 r90
  text "IO47" at 467,260 h40 r90
  text "IO48" at 567,260 h40 r90
  text "USB-" at 667,260 h40 r90
  text "USB+" at 767,260 h40 r90
  text "IO21" at 867,260 h40 r90
  text "IO26" at 967,260 h40 r90
  text "IO33" at 1067,260 h40 r90
  text "IO34" at 1167,260 h40 r90
  text "IO35" at 1267,260 h40 r90
  text "IO36" at 1367,260 h40 r90
  text "IO37" at 1467,260 h40 r90
  text "IO38" at 1567,260 h40 r90
  text "IO39" at 1667,260 h40 r90
  text "IO40" at 1767,260 h40 r90
  text "IO41" at 1867,260 h40 r90
  text "IO42" at 1967,260 h40 r90
  text "TXD" at 2067,260 h40 r90
  text "RXD" at 2167,260 h40 r90
  text "IO45" at 2267,260 h40 r90
  text "IO46" at 2367,260 h40 r90
  text "EN" at 2467,260 h40 r90
  text "GND" at 2567,260 h40 r90
  text "3V3" at 2667,260 h40 r90
Board Shape:
  the board outline again, w20

## Text inside footprints (layer, text, board x,y; h text height)
J1: Bottom Overlay "1" at 2631,1026 h40 r270
J2: Bottom Overlay "1" at 2629,-34 h40 r270
J6: Top Overlay "1" at 302,533 h40